# EAGLE board controller_top (EAGLE 7.2.0)

Size 280.81 x 115 mm. Coordinates in mm from the lower left corner, seen from the top.
Copper layers (1*16): Top 0.035559375mm / dielectric 1.501140625mm / Bottom 0.035559375mm
Design rules "4pcb-33board *": minimum track width 10mil, minimum drill 0.9mm, track to track 6mil, track to pad 6mil, pad to pad 6mil, via to via 6mil, smd to smd 6mil, copper to edge 10mil, drill to drill 10mil, minimum pad ring 10mil, minimum via ring 8mil, stop-mask expansion 4mil, vias tented up to drill 0mil, thermal gap 10mil

## Footprints (pad centres in the part's own frame; a part is rotated, then mirrored left to right if it is on the bottom)
GIMBAL_FOOTPRINT = hole 2.8: -23.5,22.95; -23.5,-22.95; 23.5,-22.95; 23.5,22.95
SPARKFUN_LCD_33 = hole 2.8: 77.5,2.5; 77.5,33.5; 2.5,2.5; 2.5,33.5
CONTROLLER_OUTLINE = hole 2.8: 3.27,4.77; 246.73,4.77; 246.095,110.865; 3.27,110.23

## Placement (x,y rotation side)
U$1  [GIMBAL_FOOTPRINT]  39.41,72.5 0 top
U$2  [GIMBAL_FOOTPRINT]  241.41,72.5 0 top
U$3  [ATMEGA128RFA1]  185.41,114 270 bottom
U$4  [SPARKFUN_LCD_33]  98.35,2.81 0 top
U$5  [CONTROLLER_OUTLINE]  15.41,0 0 top

## Library data of the parts
U$1 U$2 U$4 U$5 = Controller
U$3 = BOBs